# Altium PCB SLBMM.PcbDoc
Units mil, origin at the board's own origin, x right, y up, seen from the top; angles counter-clockwise.
Board outline 1476.38 x 984.25 mil, 4 copper layers (Top Layer, GND02, PWR03, Bottom Layer), stack 23.756 mil thick; 24 components, 16 nets, 79 pads, 11 vias.
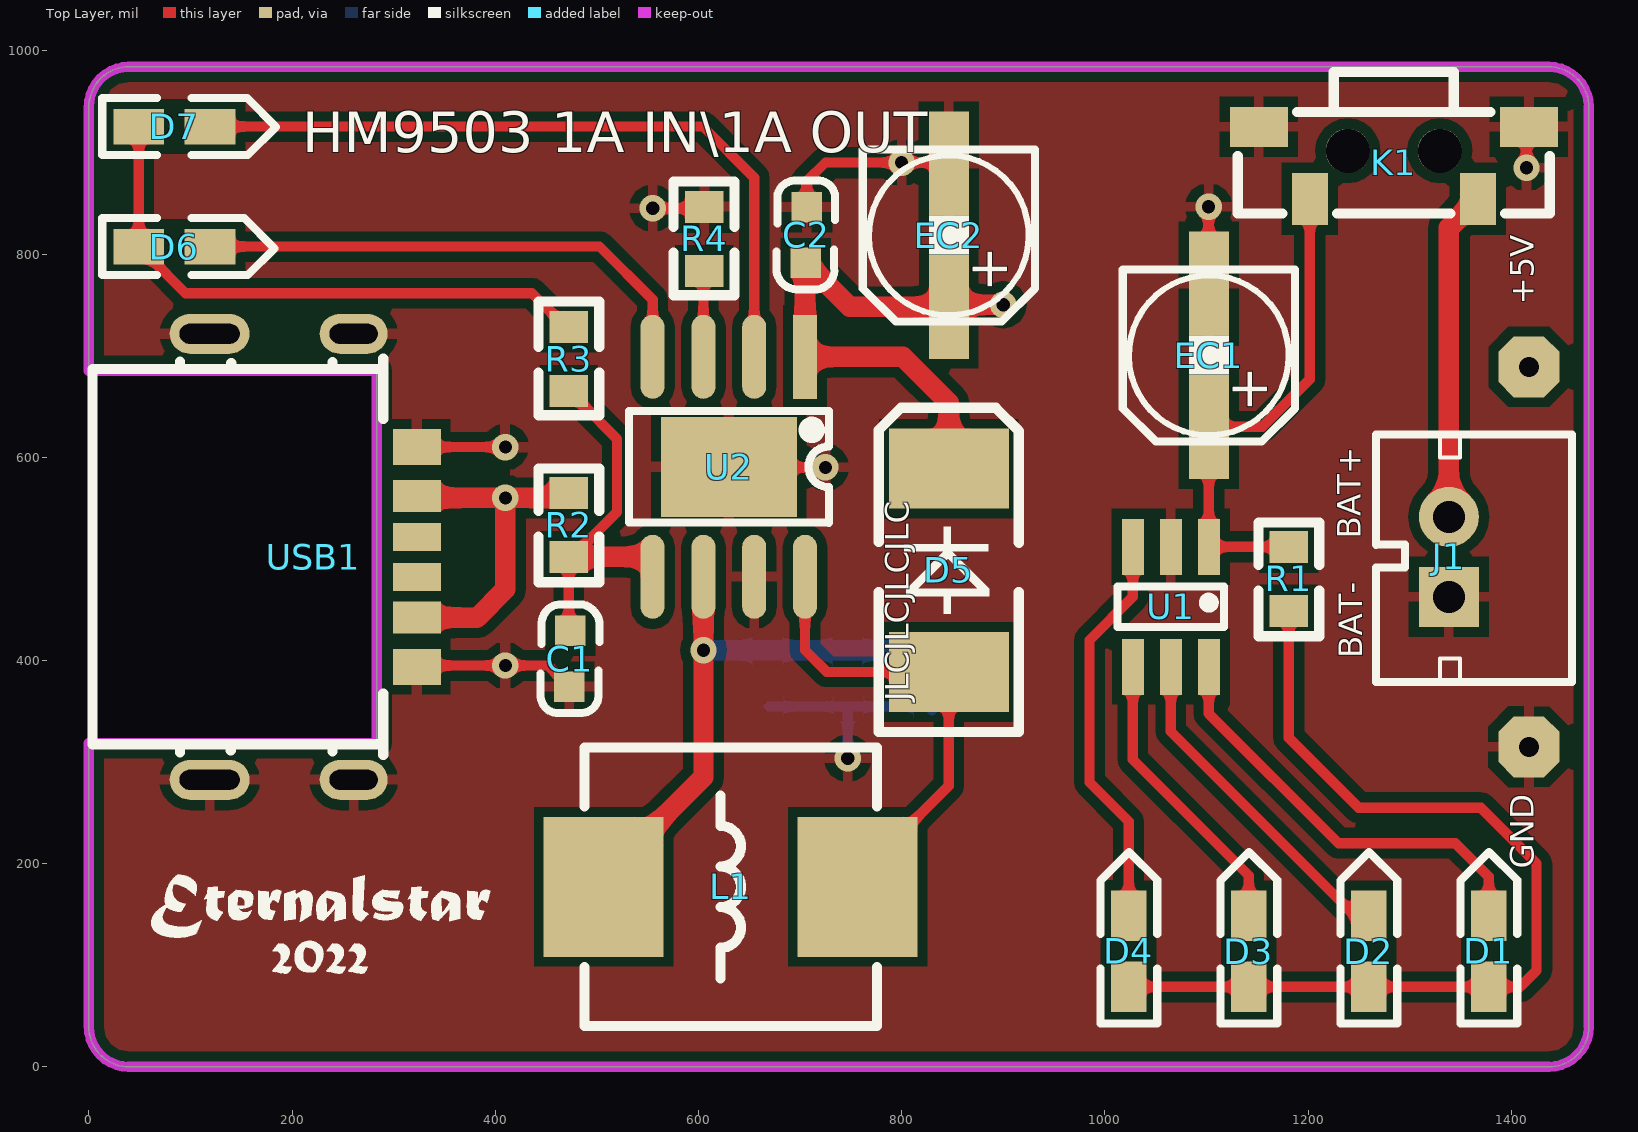
[diagram p0: Top Layer view]
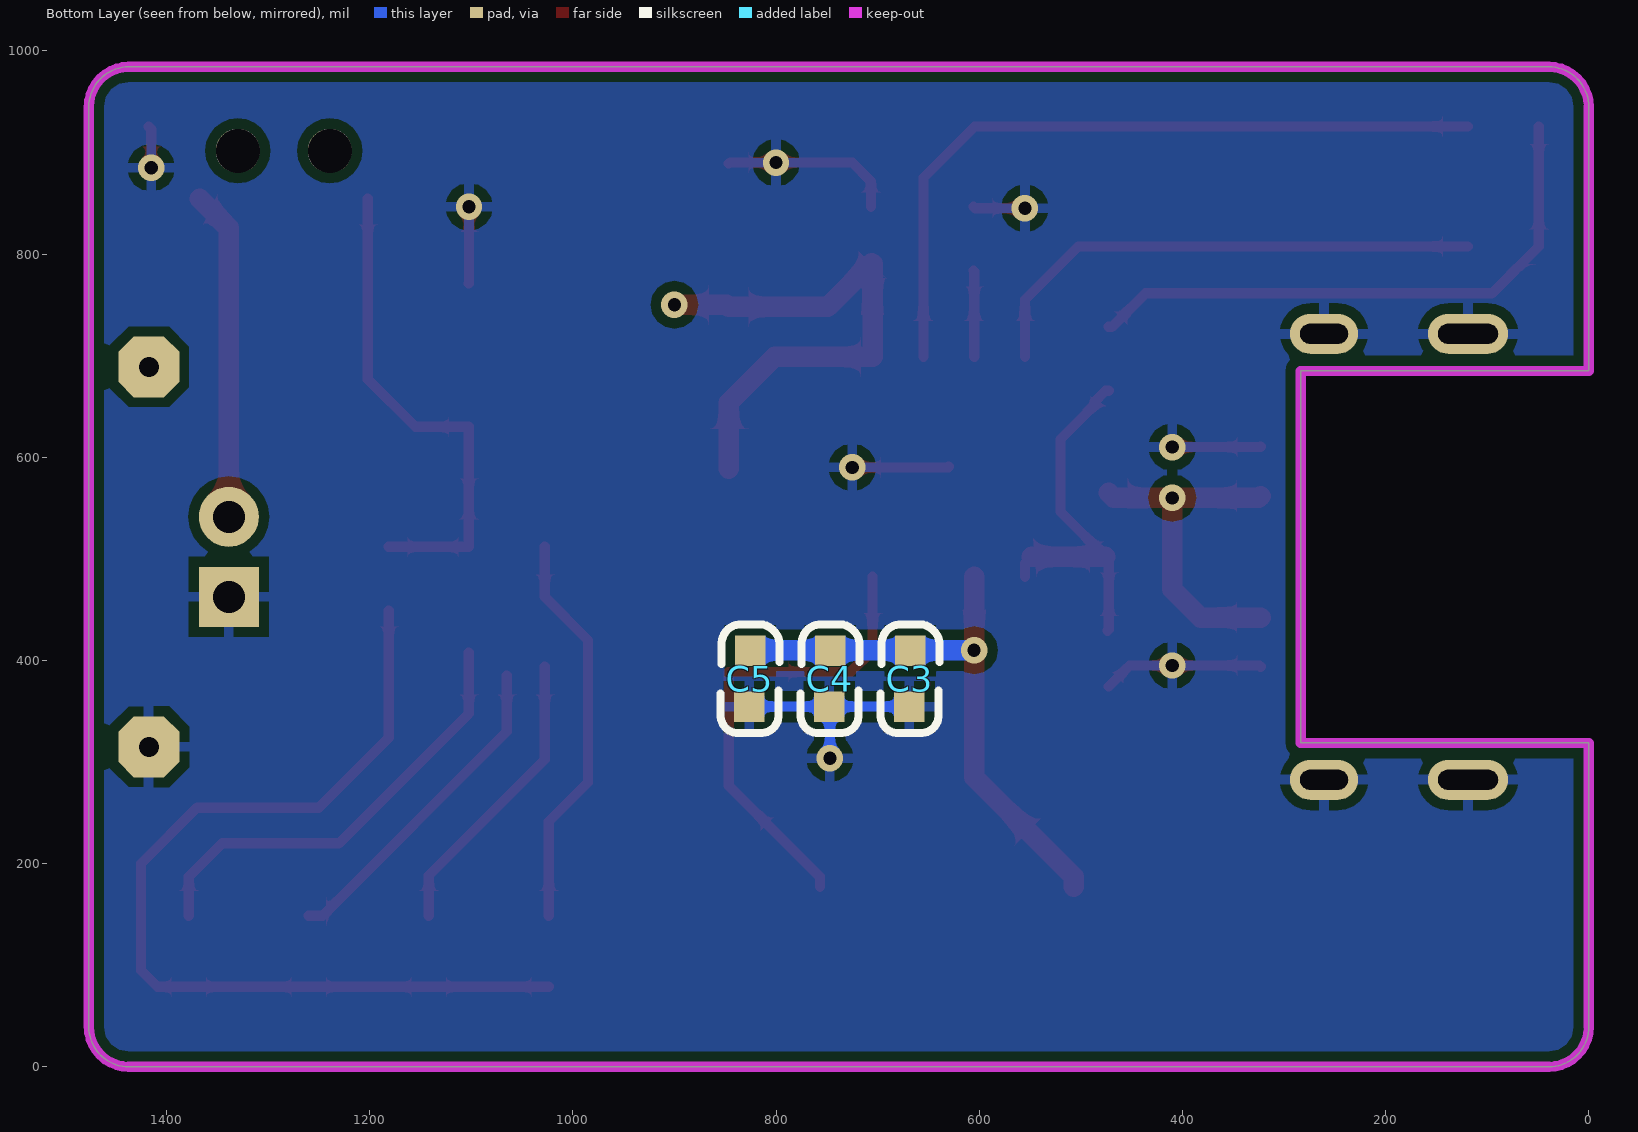
[diagram p1: Bottom Layer view, seen from below]
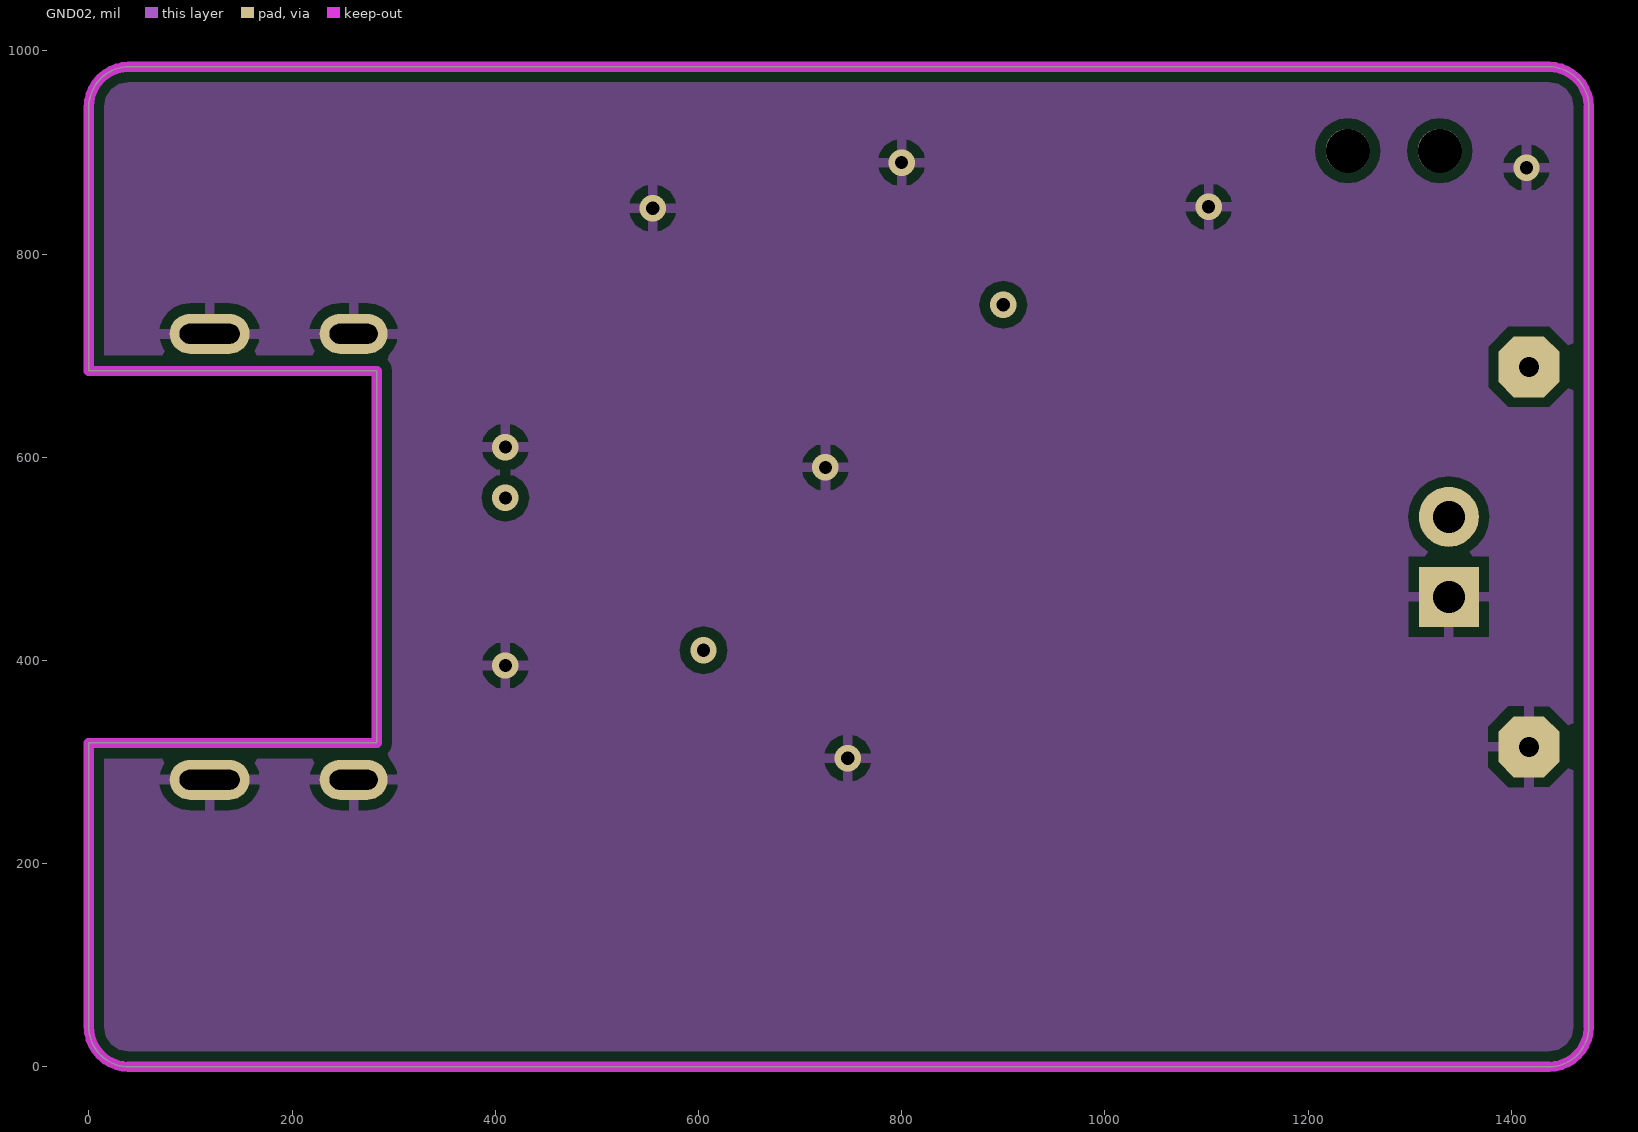
[diagram p2: GND02]
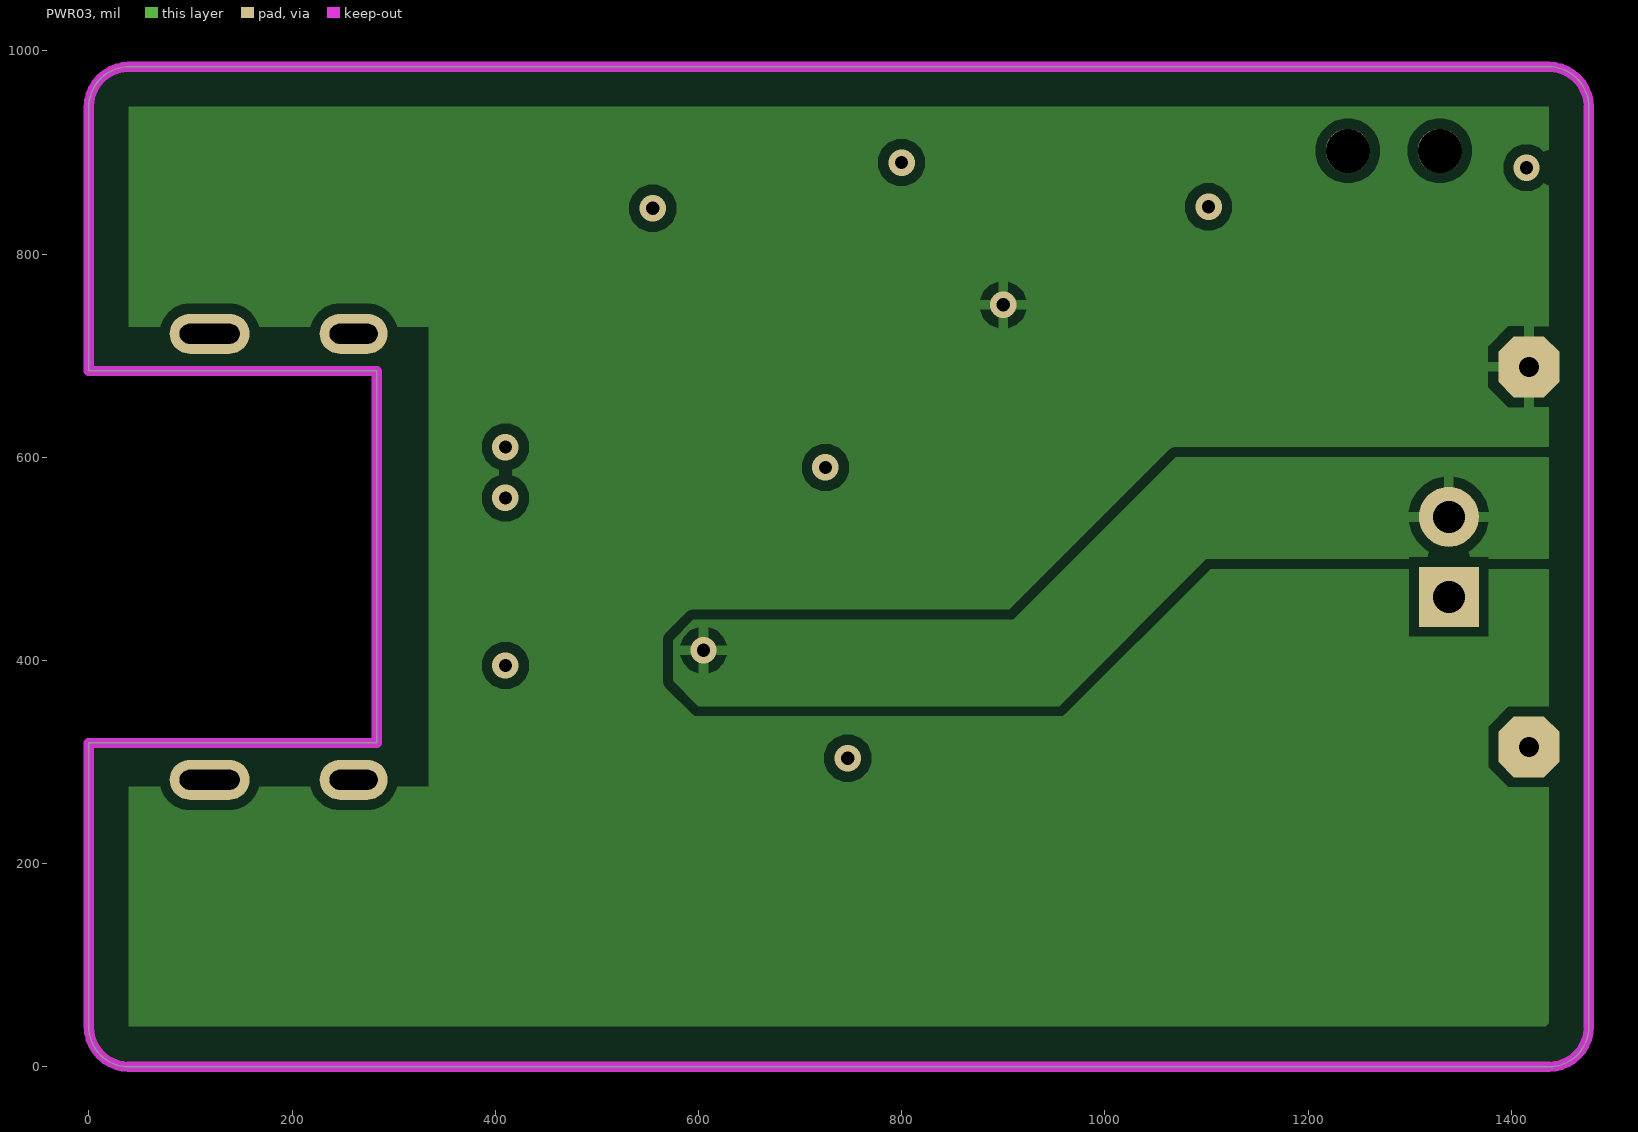
[diagram p3: PWR03]
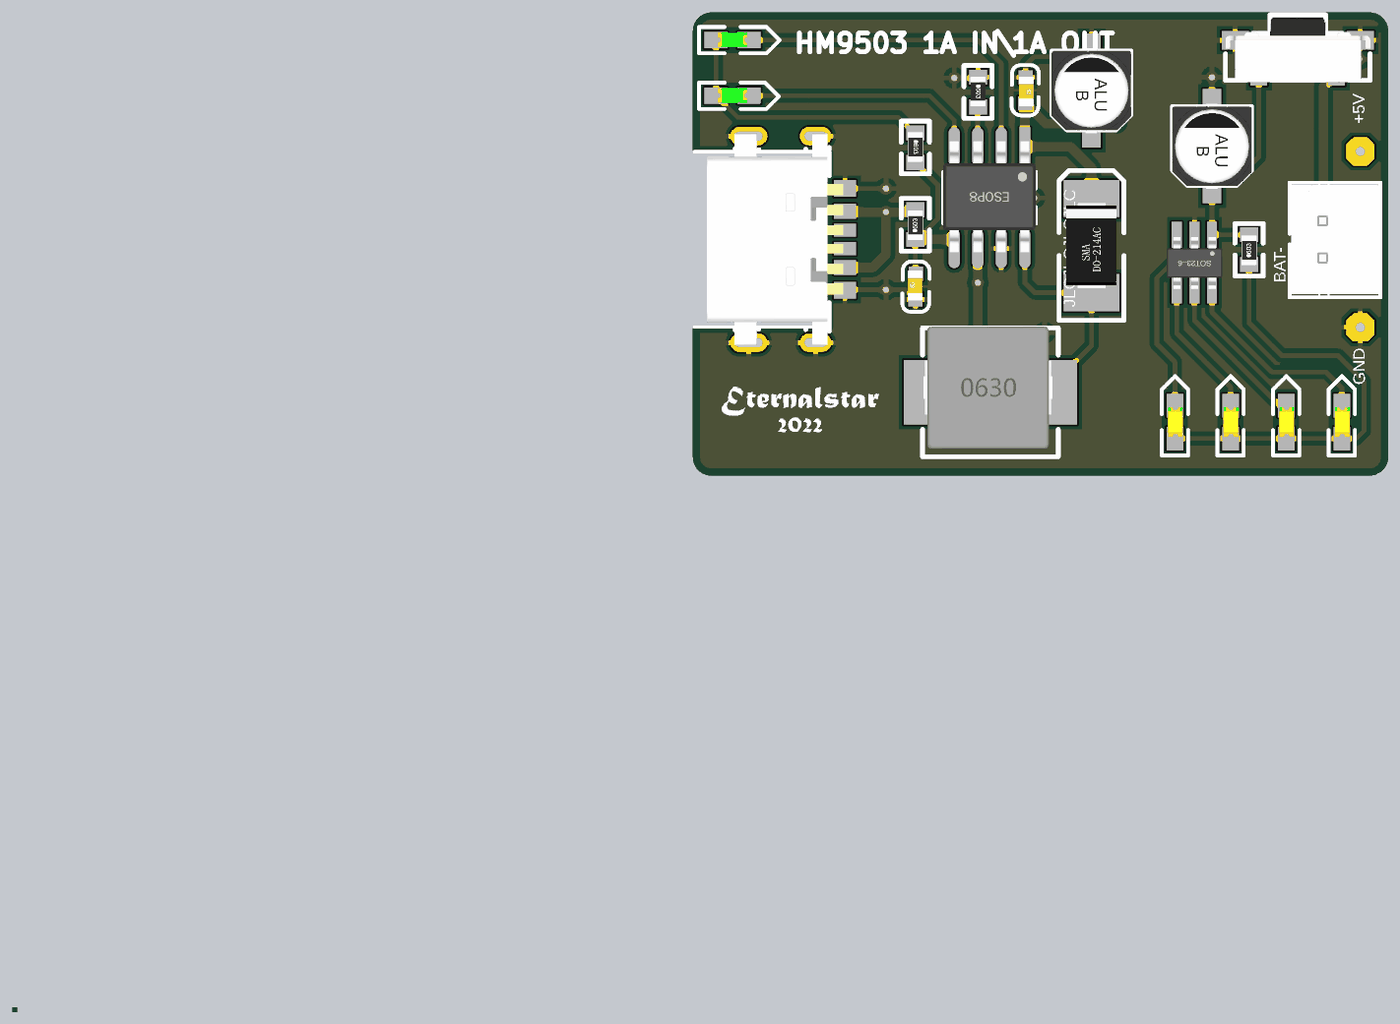
[diagram p4: 3D render of the assembled board from above, using the file's embedded part models]
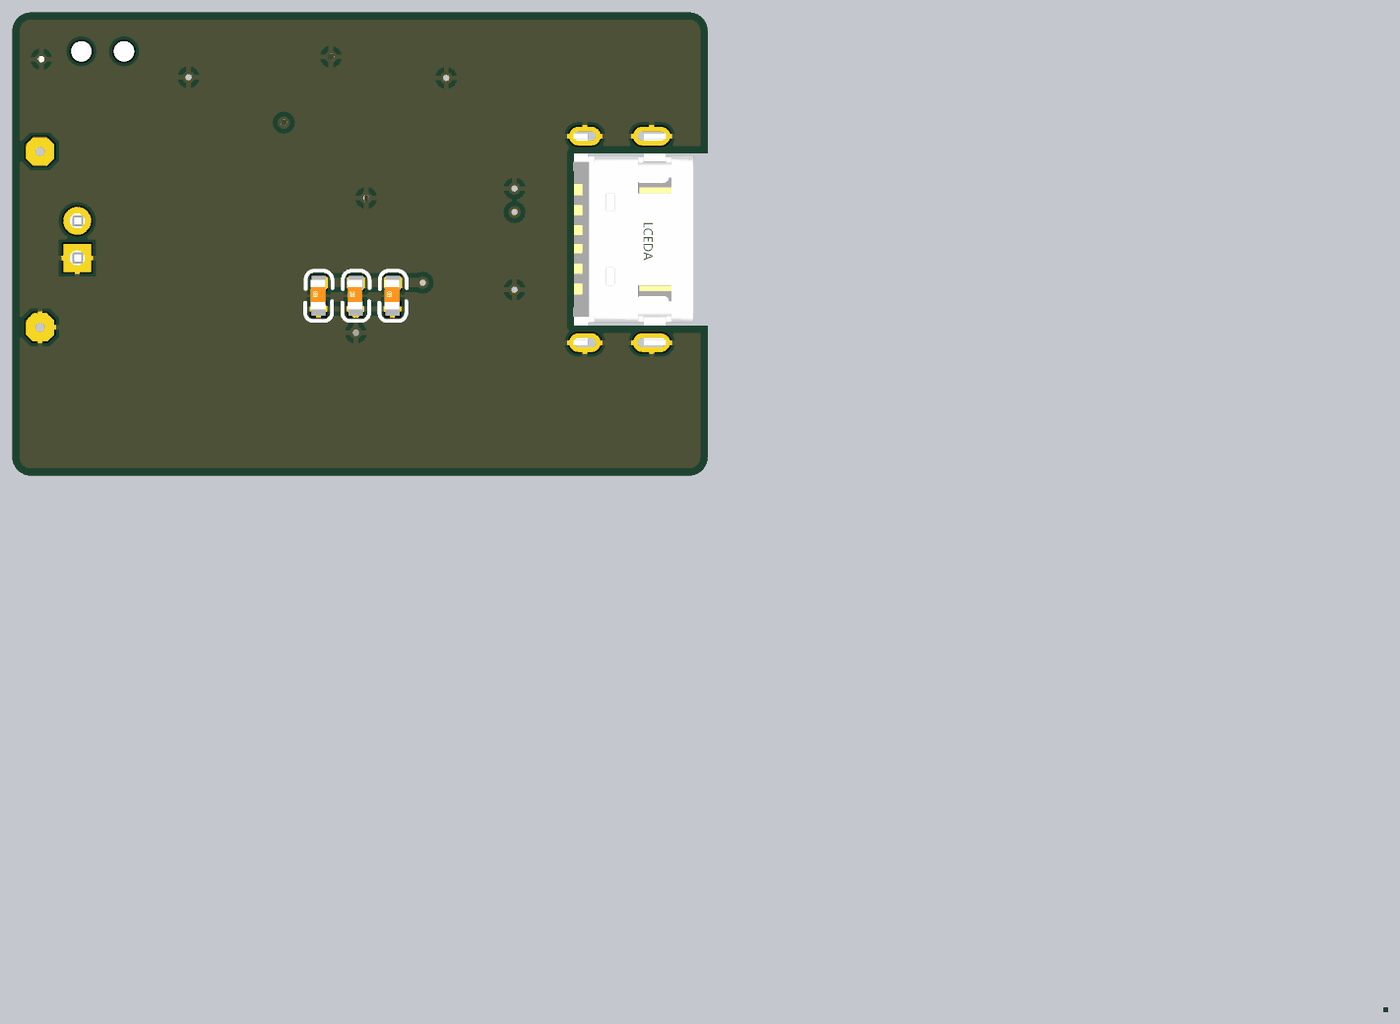
[diagram p5: 3D render of the assembled board from below, using the file's embedded part models]

## Layer stack, top to bottom
Top Solder: solder mask 0.4, Solder Resist, Dk 3.5
Top Layer: signal copper 1.4
Dielectric 2: prepreg 2.8, PP-006, Dk 4.1
GND02: signal copper 1.378
Dielectric 1: dielectric 12.6, FR-4, Dk 4.8
PWR03: signal copper 1.378
Dielectric 3: prepreg 2.8, PP-006, Dk 4.1
Bottom Layer: signal copper 1.4
Bottom Solder: solder mask 0.4, Solder Resist, Dk 3.5

## Board outline
0,39.37 0,318.75 283.46,318.75 283.46,685 0,685 0,944.88 cw(c39.37,944.88) 39.37,984.25 1437.01,984.25 cw(c1437.01,944.88) 1476.38,944.88 1476.38,39.37 cw(c1437.01,39.37) 1437.01,0 39.37,0 cw(c39.37,39.37)
cut-out: -1445,-1140 -1435,-1140 -1435,-1130 -1445,-1130

## Design rules (kind name [scope] priority, off if disabled: settings)
Clearance [All] p1: gap=10 ignorepadtopadclearanceinfootprint=TRUE except(0: Arc-Hole Track-Hole SMDPad-Hole THPad-Hole Via-Hole Fill-Hole Poly-Hole Region-Hole Text-Hole)
DiffPairsRouting [All] p1: maxlimit=100 minlimit=3.5 mostfreqgap=10 toplayer_minwidth=3.5 toplayer_maxwidth=30 toplayer_prefwidth=10 midlayer1_minwidth=3.5 midlayer1_maxwidth=30 midlayer1_prefwidth=10 midlayer2_minwidth=3.5 midlayer2_maxwidth=30 midlayer2_prefwidth=10 bottomlayer_minwidth=3.5 bottomlayer_maxwidth=30 bottomlayer_prefwidth=10 maxuncoupledlength=500
MinimumSolderMaskSliver [All] p1: minsoldermaskwidth=0
PolygonConnect [All] p1: connectstyle=Relief reliefconductorwidth=10 reliefentries=4 polygonreliefangle="90 Angle" airgapwidth=10
RoutingVias [All] p1: holewidth=13 width=26 viastyle="Through Hole" minholewidth=3 minwidth=5 maxholewidth=300 maxwidth=500
SilkToSilkClearance [All] p1: silktosilkclearance=0
SilkToSolderMaskClearance [IsPad] p1: minsilkscreentomaskgap=0 clearancetoexposedcopper=TRUE
SolderMaskExpansion [All] p1: expansion=4 istentingtop=FALSE
Width [All] p1: maxlimit=30 minlimit=3.5 preferedwidth=10
26 further rules are at their usual default settings.

## Components (designator, comment, footprint, x,y, rotation, side; value= is the part's Value field where it differs from the comment)
C1 "10uF" 0603C 472.44,374.02 r90 top locked
C2 "0.1uF" 0603C 706.98,846.46 r270 top locked
C3 "0.1uF/16V" 0603C 669.29,354.33 r90 bottom
C4 "22uF/16V" 0603C 748.03,354.33 r90 bottom
C5 "22uF/16V" 0603C 826.77,354.33 r90 bottom
D1 "LED_Y" LED-0603Y 1377.95,78.74 r90 top
D2 "LED_Y" LED-0603Y 1259.84,78.74 r90 top
D3 "LED_Y" LED-0603Y 1141.73,78.74 r90 top
D4 "LED_Y" LED-0603Y 1023.62,78.74 r90 top
D5 "SS32 3A 20V" SMA/DO-214AC 846.46,393.7 r90 top locked
D6 "LED_G" LED-0603G 49.21,807.09 r0 top locked
D7 "LED_R" LED-0603B 49.21,925.2 r0 top locked
EC1 "1uF" SMD-EC4.0X4.3X5.4 1102.36,629.92 r90 top
EC2 "47uF" SMD-EC4.0X4.3X5.4 846.46,748.03 r90 top locked
J1 "PH2.0-2P" PH2.0-2P 1338.58,462.6 r90 top locked
K1 "KEY" SMD-3.5x7.8x2.5_C 1417.32,925.2 r180 top
L1 "10uH" 0630L 511.81,177.17 r0 top locked
R1 "330R" 0603R 1181.1,448.82 r90 top locked
R2 "0.3R" 0603R 472.44,501.97 r90 top locked
R3 "1K" 0603R 472.44,728.35 r270 top
R4 "1K" 0603R 605.63,846.46 r270 top locked
U1 "HM1160" SOT23-6 1102.36,511.81 r180 top locked
U2 "HM9503" ESOP8 629.92,590.55 r270 top locked
USB1 "USB-C 6P CB0.8(073)" USB-C-SMD_TYPE-C-6P-CB0.8-073 322.83,610.24 r270 top locked

## Footprints (in the part's own frame and the unit in brackets; to place one, negate y for a bottom-side part, rotate by r counter-clockwise, add the part's x,y. Pads: shape width x height; smd on the part's side, far side on the other; paste and mask are expansions set on the pad)
0603C [mil]
  rect 30x30 smd: 1(0.21,-0.35) 2(55.21,-1.35)
  silkscreen extent -26,-30 81,28, body extent -1,-15 62,17, height 12
0603R [mm]
  rect 0.8x0.965 smd: 1(0,0) 2(1.6,0)
  silkscreen extent -0.64,-0.76 2.21,0.76, body extent -0.04,-0.41 1.56,0.41, height 0.45
0630L [mm]
  rect 3x3.5 smd: 1(-0.127,0) 2(6.223,0)
  silkscreen extent -0.61,-3.48 6.71,3.48, body extent -0.55,-3.05 6.4,3.55, height 3.05
ESOP8 [mm]
  rect 2.1x0.6 smd: 1(-2.75,1.905)
  oval 2.1x0.6 smd: 2(-2.75,0.635) 3(-2.75,-0.635) 4(-2.75,-1.905) 5(2.75,-1.905) 6(2.75,-0.635) 7(2.75,0.635) 8(2.75,1.905)
  rect 2.5x3.4 smd paste-2: 9(0,0)
  rect 0.9x0.7 on Top Paste: 10(-0.625,1.1) 10(-0.625,0) 10(-0.625,-1.1) 11(0.65,1.1) 11(0.65,0) 11(0.65,-1.1)
  silkscreen extent -1.4,-2.5 1.4,2.5, body extent -3.05,-2.5 2.95,2.5, height 1.53
LED-0603B [mil]
  rect 50x35 smd: A(0,0.26) K(70,0.26)
  silkscreen extent -36,-28 135,28, body extent 4,-15 66,17, height 24
LED-0603G [mil]
  rect 50x35 smd: A(0,0.26) K(70,0.26)
  silkscreen extent -36,-28 134,28, body extent 4,-15 66,17, height 24
LED-0603Y [mil]
  rect 50x35 smd: A(0,0) K(70,0)
  silkscreen extent -36,-28 133,28, body extent 4,-17 66,15, height 24
PH2.0-2P [mm]
  rect 1.5x1.5 hole 0.8: 1(0,0)
  round 1.5 hole 0.8: 2(2,0)
  silkscreen extent -2.13,-3.08 4.06,1.82, body extent -1.95,-2.97 3.95,1.73, height 6.01
SMA/DO-214AC [mm] "塑封二极管"
  rect 2x3 smd: A(-0.127,0) K(4.953,0)
  silkscreen extent -1.63,-1.75 6.48,1.75, body extent 0.11,-1.35 4.71,1.35, height 2.4
SMD-3.5x7.8x2.5_C [mm]
  rect 1.45x1 smd: 1(0,0) 2(6.75,0)
  rect 0.9x1.3 smd: 3(1.275,1.8) 4(5.475,1.8)
  round 1.1 hole 1.1 unplated: ""(2.225,0.6) ""(4.525,0.6)
  silkscreen extent -0.52,-1.37 7.27,2.17, body extent -0.53,-1.24 7.27,2.26, height 3.5
SMD-EC4.0X4.3X5.4 [mm]
  rect 2.6x1 smd: 1(0,0) 2(3.579,0)
  silkscreen extent -0.36,-2.15 3.94,2.15, body extent -0.52,-2.15 4.08,2.15, height 5.4
SOT23-6 [mm]
  rect 0.55x1.4 smd: 1(0,0) 2(0.95,0) 3(1.9,0) 4(1.9,3) 5(0.95,3) 6(0,3)
  silkscreen extent -0.38,0.99 2.29,2.01, body extent -0.56,0.12 2.44,2.93, height 1.15
USB-C-SMD_TYPE-C-6P-CB0.8-073 [mm]
  rect 0.9x1.2 smd: 1(0,0) 6(5.5,0)
  rect 0.8x1.2 smd: 2(1.23,0) 5(4.27,0)
  rect 0.7x1.2 smd: 3(2.25,0) 4(3.25,0)
  oval 1x1.7 hole 0.5 slot 1.2 at 90 deg: 7(-2.825,-1.58) 8(8.325,-1.58)
  oval 1x2 hole 0.5 slot 1.5 at 90 deg: 7(-2.825,-5.18) 8(8.325,-5.18)
  silkscreen extent -2.21,-8.11 7.71,-0.84, body extent -2.98,-7.45 8.47,-0.1, height 1.69

## Part data
C1 C2 C3 C4 C5: library part CAP, "无极性电容"
D1 D2 D3 D4 D6 D7: library part LED
D5: library part "DIODE SCHOTTKY", "肖特基二极管"
EC1 EC2: library part SMD_ECAP, "贴片电解电容"
L1: library part INDUCTOR, "INDUCTOR"
R1 R2 R3 R4: library part RES
U1: "单节锂电池电量指示芯片"
U2: "1A锂电池充电和5V/1A升压控制芯片"
USB1: BOM_Manufacturer="SHOU HAN(首韩)", BOM_Manufacturer Part="TYPE-C 6P CB0.8(073)", BOM_Supplier=LCSC, BOM_Supplier Part=C2858273, Contributor=LCSC, spicePre=U, spiceSymbolName="TYPE-C 6P CB0.8(073)"

## Free pads (board coordinates)
  oct 60x60 hole 19.68: 3(1417.32,688.98) 4(1417.32,314.96)

## Via types
v1: diameter 26, hole 13, Top Layer to Bottom Layer, 11 vias

## Nets (pads, with @x,y where several pads share a name; then routed paths per layer and width w, separated by ;. In a path a pad name is that pad's centre, name@x,y a point inside that pad or via, vN(x,y) a via of type N, cw(c..) or ccw(c..) an arc to the next point about the centre after c; other vN are vias at no path point)
5V_OUT: C2.2 D5.K EC2.1 pad.3 U2.1 | length 530.9
  Top Layer w20: D5.K 846.46,653.54 801.18,698.82 U2.1 704.92,790.54 C2.2 748.84,748.03 EC2.1 848.43,750 v1(900,750)
BAT+: C3.2 C4.2 C5.2 J1.2 K1.3 L1.1 U2.6 | length 1048.2
  Top Layer w20: L1.1 506.81,187.01 604.92,285.12 U2.6 ; J1.2 1338.58,825.79 K1.3
  Bottom Layer w20: v1(605,410) C5.2@824.96,410 ; C3.2@667.94,410 746.68,410 C5.2@824.96,410 ; C5.2 C5.2@824.96,410
GND: C1.1 C2.1 C3.1 C4.1 C5.1 EC1.2 EC2.2 J1.1 K1.1 K1.2 pad.4 R4.1 U1.2 U2.7 U2.9 USB1.1 USB1.6 USB1.7 USB1.8 | length 898.3
  Top Layer w10: USB1.6 324.13,395 v1(410,395) 452.02,395 C1.1 ; USB1.1 323.07,610 v1(410,610) ; v1(555,845) 604.17,845 R4.1 ; U2.9 630.47,590 v1(725,590) ; C2.1 706.63,871.63 725,890 v1(800,890) 845.39,890 EC2.2 ; v1(1102.17,846.46) 1102.17,771.02 EC1.2 ; v1(1415,885) 1415,922.87 K1.1
  Bottom Layer w10: C3.1 C4.1 ; v1(746.99,303.76) 746.99,349.88 745,351.87 C4.1 ; C5.1@830,350.96 C5.1 C4.1
NetC1_2: C1.2 R2.1 R3.2 U2.5 | length 375.1
  Top Layer w10: R3.2 475.69,665.35 486.44,654.61 486.44,651.36 520,617.8 520,546.28 475.69,501.97 R2.1 472.44,430.58 C1.2 ; U2.5@548.63,501.97 554.92,495.68 U2.5
  Top Layer w20: R2.1@475.69,501.97 U2.5@548.63,501.97
NetD1_A: D1.A D2.A D3.A D4.A R1.1 | length 933.3
  Top Layer w10: D4.A D3.A D2.A D1.A 1408.74,78.74 1425,95 1425,200 1370,255 1250,255 1181.1,323.9 R1.1
NetD1_K: D1.K U1.6 | length 440.4
  Top Layer w10: U1.6@1102.36,407.64 U1.6 1102.36,347.64 1230,220 1345,220 1377.95,187.05 D1.K
NetD2_K: D2.K U1.5 | length 325
  Top Layer w10: U1.5@1064.96,385.04 1064.96,330.04 1246.26,148.74 D2.K
NetD3_K: D3.K U1.4 | length 292.3
  Top Layer w10: U1.4 1027.56,302.44 1141.73,188.27 D3.K
NetD4_K: D4.K U1.3 | length 396.7
  Top Layer w10: D4.K 1023.62,241.38 985,280 985,420 1027.56,462.56 U1.3
NetD5_A: D5.A L1.2 U2.8 | length 471.3
  Top Layer w10: U2.8 704.92,410.08 726.3,388.7 D5.A 846.46,276.65 756.81,187.01 L1.2
NetD6_A: D6.A D7.A R3.1 | length 574.1
  Top Layer w10: D7.A D6.A 95.2,761.36 436.18,761.36 469.19,728.35 R3.1
NetD6_K: D6.K U2.4 | length 513.7
  Top Layer w10: D6.K 502.66,807.34 555,755 555,698.9 U2.4
NetD7_K: D7.K U2.2 | length 732.8
  Top Layer w10: D7.K 604.55,925.45 654.92,875.08 U2.2
NetEC1_1: EC1.1 K1.4 R1.2 U1.1 | length 493.2
  Top Layer w10: R1.2 U1.1 EC1.1 1154.92,629.92 1201.77,676.77 K1.4
NetR4_2: R4.2 U2.3 | length 84.9
  Top Layer w10: U2.3 604.92,782.76 R4.2
VBUS: R2.2 USB1.2 USB1.5 | length 341.1
  Top Layer w20: USB1.5 382.13,442.13 410,470 v1(410,560) ; USB1.2 324.65,560 v1(410,560) ; R2.2 467.48,560 v1(410,560)
pads on no net: K1. U2.10 U2.11 USB1.3 USB1.4

## Polygon pours and split planes (outlines as drawn)
5V_OUT on PWR03 "5V_OUT_L03_P001" (solid, pour order 1): 39.37,944.88 1437.01,944.88 1437.01,39.37 39.37,40 39.37,275.59 334.65,275.59 334.65,669.29 334.65,725 334.65,730 334.65,728.35 39.37,728.35
BAT+ on PWR03 "BAT+_L03_P000" (solid, pour order 0): 910,440 1070,600 1437.01,600 1437.01,500 1100,500 955,355 600,355 575,380 575,420 595,440
GND on GND02 "GND_L02_P002" (solid, pour order 2): 0,39.37 0,318.75 283.46,318.75 283.46,685 0,685 0,944.88 cw(c39.37,944.88) 39.37,984.25 1437.01,984.25 cw(c1437.01,944.88) 1476.38,944.88 1476.38,39.37 cw(c1437.01,39.37) 1437.01,0 39.37,0 cw(c39.37,39.37)
GND on Top Layer "GND_L01_P003" (solid, pour order 3): 0,39.37 0,318.75 283.46,318.75 283.46,685 0,685 0,944.88 cw(c39.37,944.88) 39.37,984.25 1437.01,984.25 cw(c1437.01,944.88) 1476.38,944.88 1476.38,39.37 cw(c1437.01,39.37) 1437.01,0 39.37,0 cw(c39.37,39.37)
GND on Bottom Layer "GND_L04_P004" (solid, pour order 4): 0,39.37 0,318.75 283.46,318.75 283.46,685 0,685 0,944.88 cw(c39.37,944.88) 39.37,984.25 1437.01,984.25 cw(c1437.01,944.88) 1476.38,944.88 1476.38,39.37 cw(c1437.01,39.37) 1437.01,0 39.37,0 cw(c39.37,39.37)

## Keep-outs
Keep-Out Layer:
  the board outline again, w10

## Silkscreen, mask and mechanical layers (free items; w line width, h text height)
Top Overlay:
  drawing of 15 lines, arcs and shapes, not listed
  text "HM9503 1A IN\1A OUT" at 210,900 h40
  text "+5V" at 1430,750 h40 r90
  text "BAT+" at 1260,520 h40 r90
  text "BAT-" at 1261.4,402.37 h40 r90
  text "JLCJLCJLCJLC" at 815,360 h40 r90
  text "GND" at 1430,195 h40 r90

## Text inside footprints (layer, text, board x,y; h text height)
EC1: Top Overlay "+" at 1159.84,644.5 h39.37 r90
EC2: Top Overlay "+" at 903.94,762.61 h39.37 r90